# Altium PCB STM32F030.PcbDoc
Units mil, origin at the board's own origin, x right, y up, seen from the top; angles counter-clockwise.
Board outline 1960 x 1815 mil, 2 copper layers (Top Layer, Bottom Layer); 31 components, 48 nets, 165 pads, 26 vias.
Unrouted connection lines stored in the file: 2.
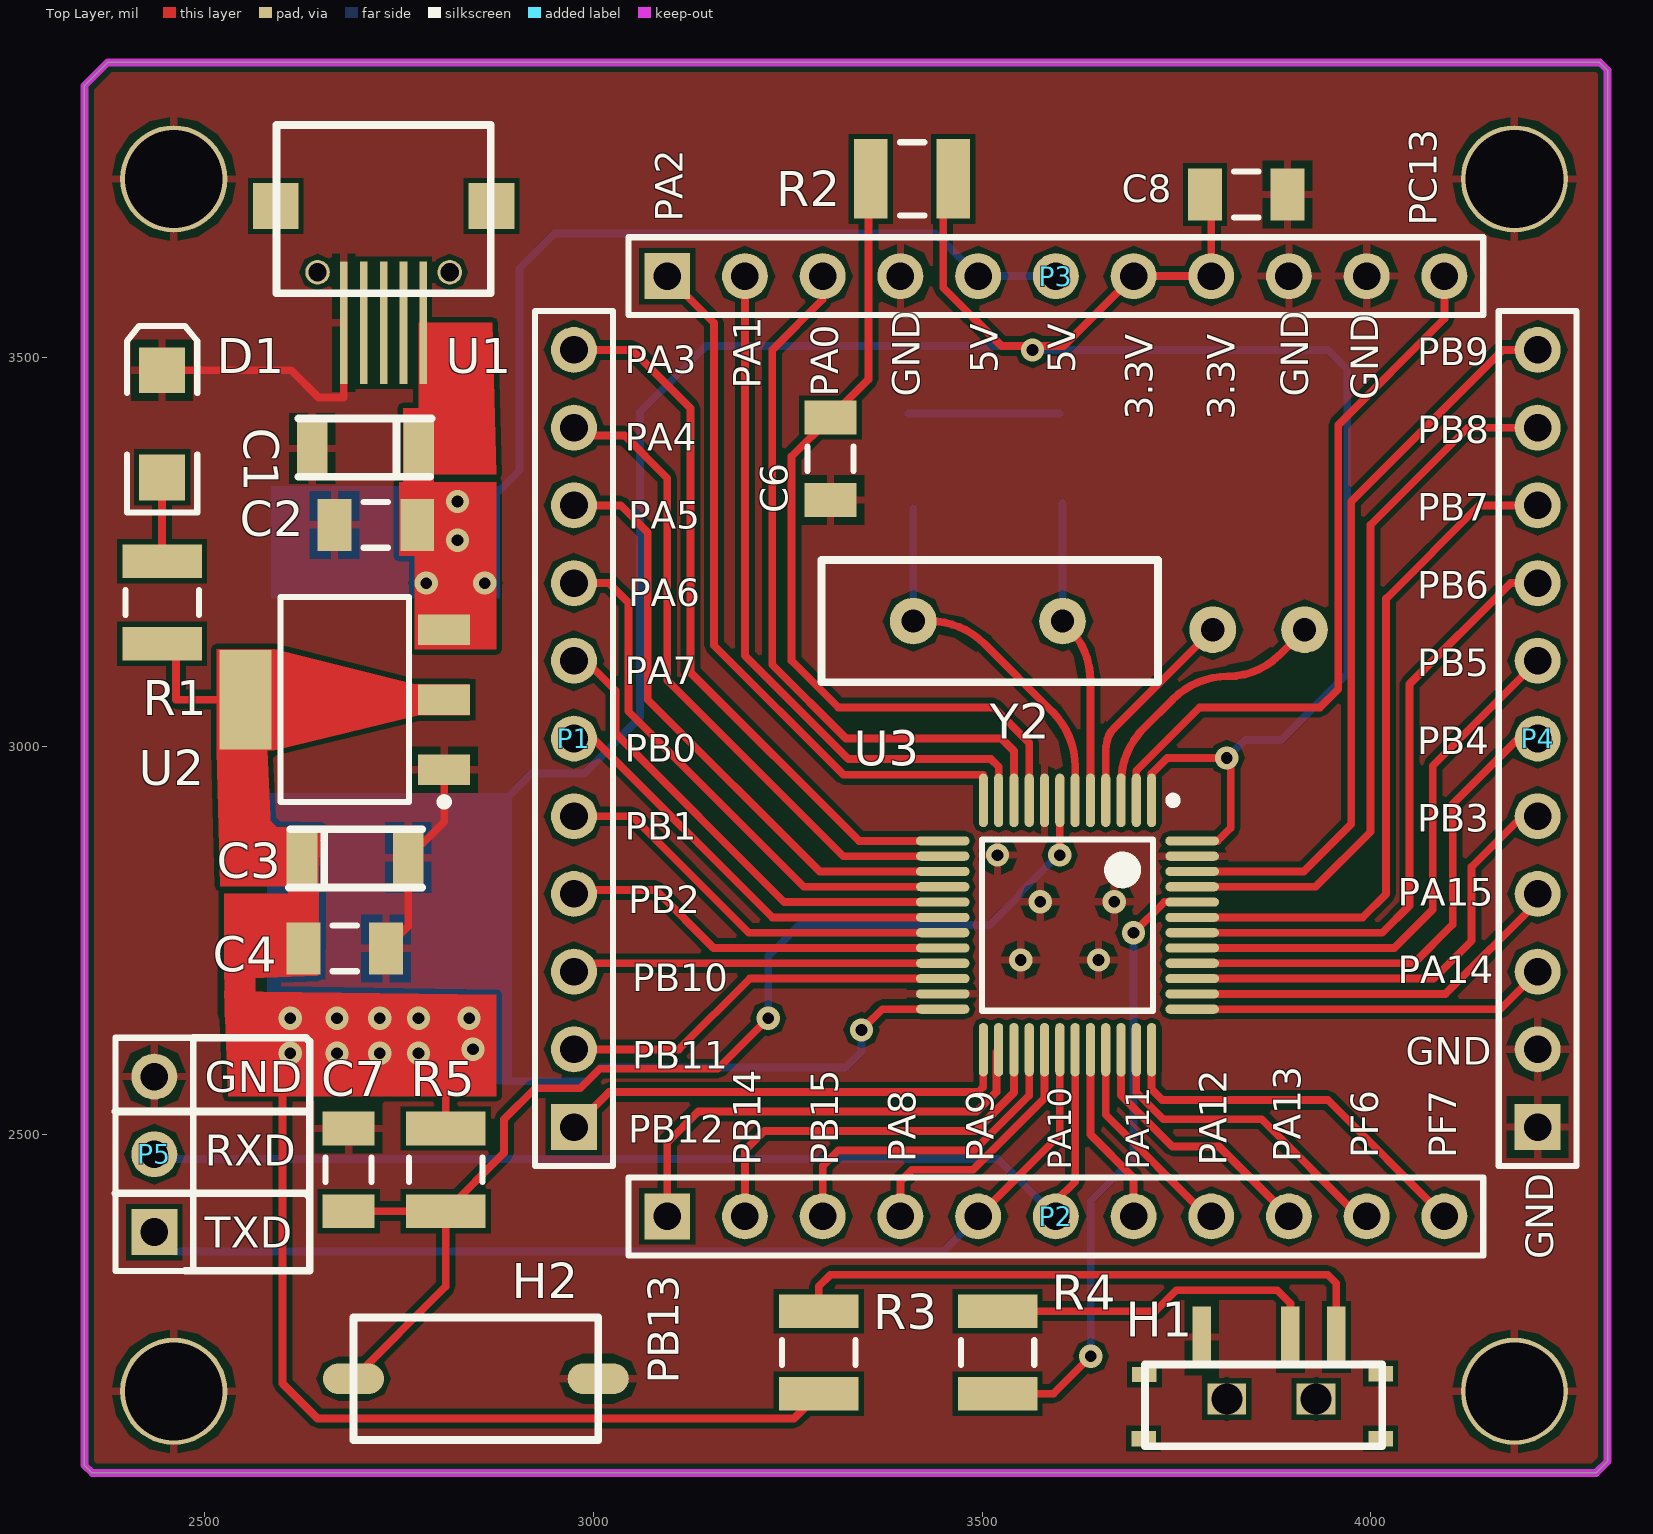
[diagram p0: Top Layer view]
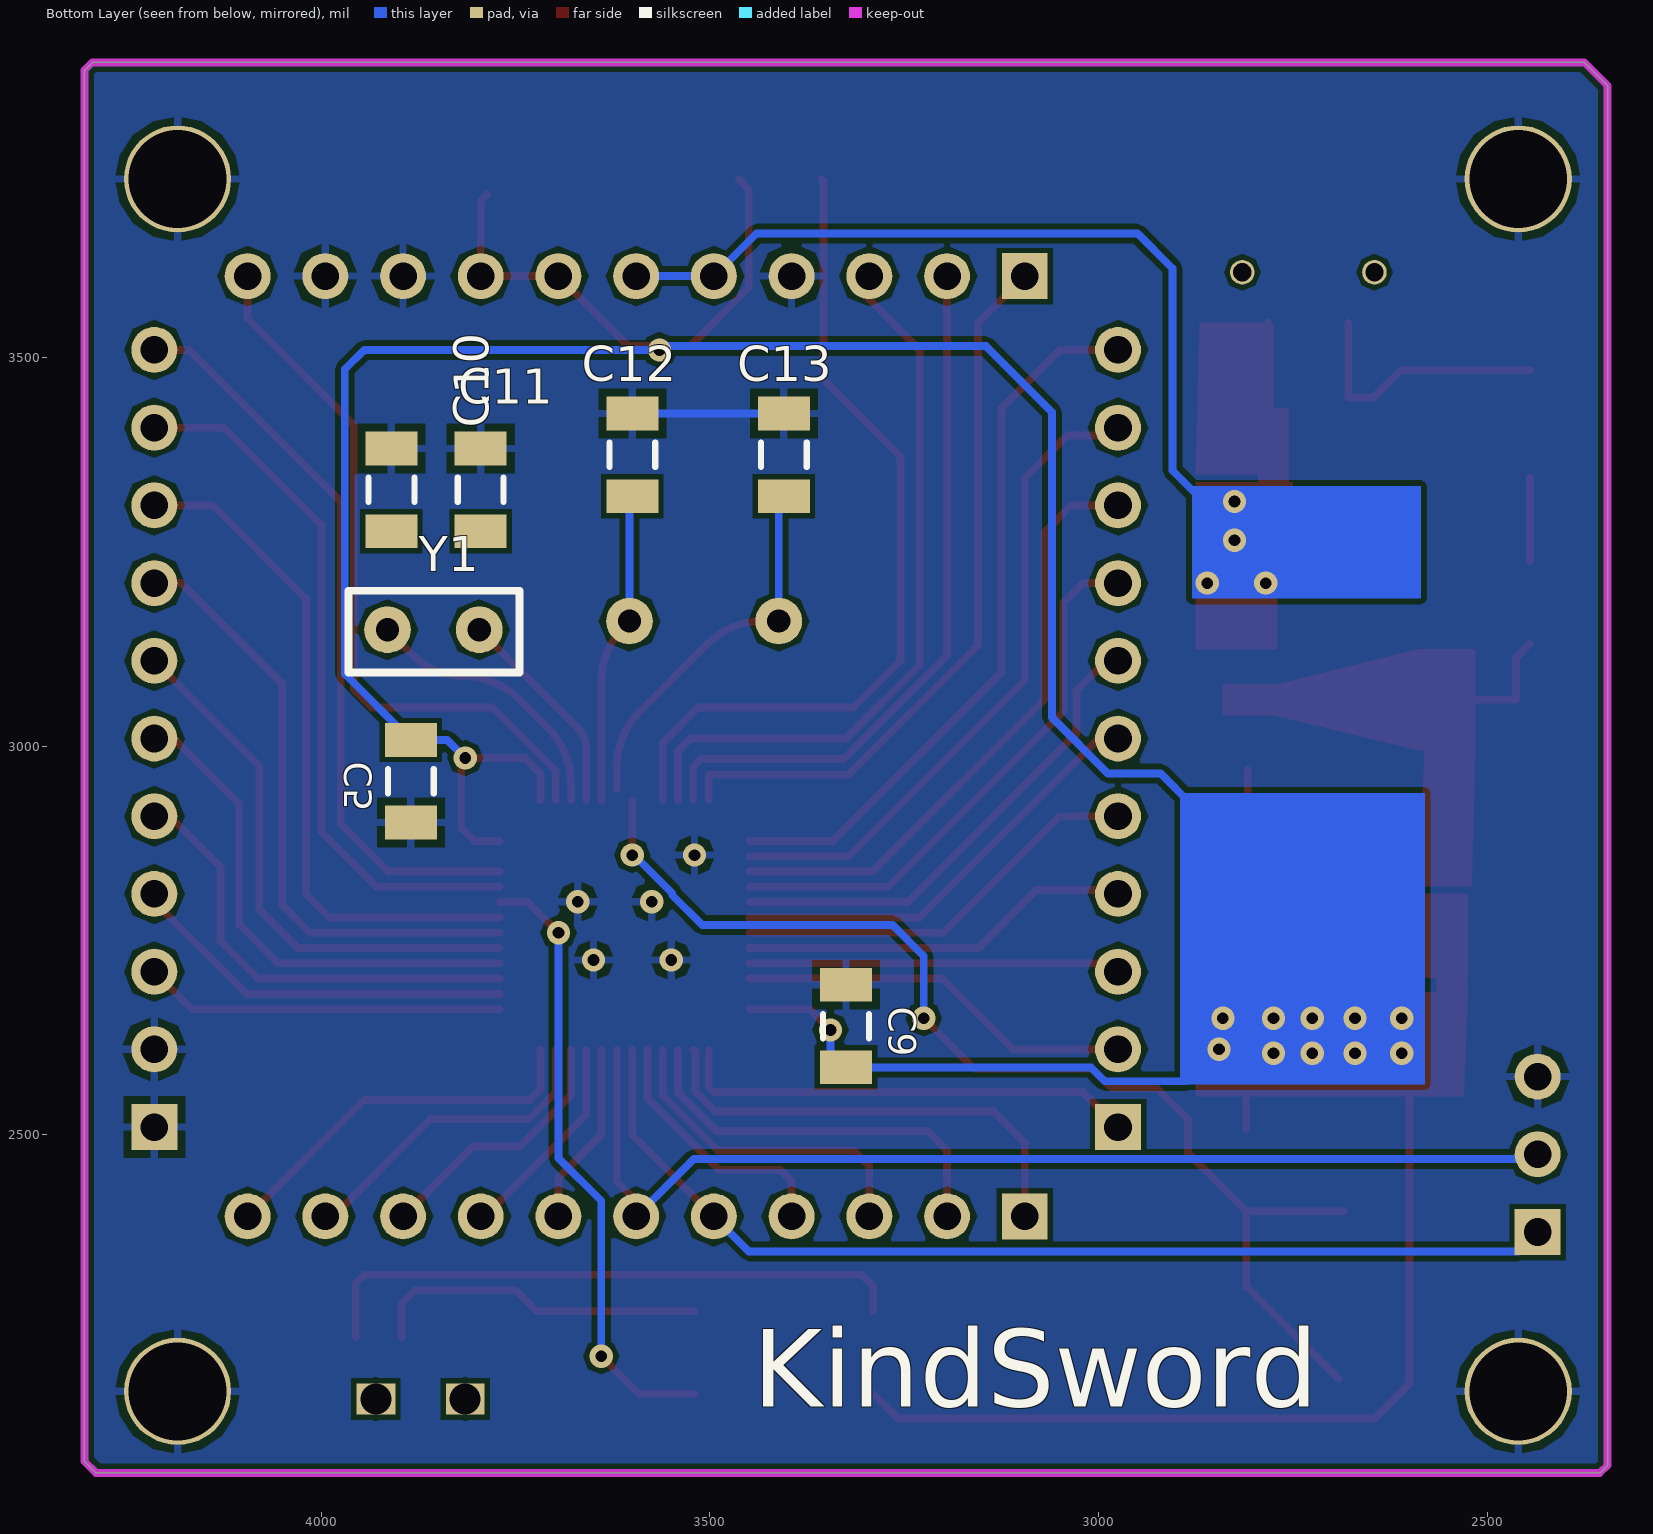
[diagram p1: Bottom Layer view, seen from below]

## Layer stack, top to bottom
Top Layer: signal copper 1.4
Dielectric: dielectric 12.6, FR-4, Dk 4.8
Bottom Layer: signal copper 1.4

## Board outline
2345,2075 2355,2065 4290,2065 4305,2080 4305,3870 4295,3880 2375,3880 2345,3850

## Design rules (kind name [scope] priority, off if disabled: settings)
Clearance U1 [All vs InComponent('U1')] p1: gap=6
Clearance MCU [InComponent('U3')] p2: gap=6
Clearance [All] p3: gap=6.5
PolygonConnect [All] p1: connectstyle=Relief reliefconductorwidth=10 reliefentries=4 polygonreliefangle="90 Angle" airgapwidth=10
RoutingVias [All] p1: holewidth=15 width=30 viastyle="Through Hole" minholewidth=10 minwidth=20 maxholewidth=50 maxwidth=100
SolderMaskExpansion [All] p1: expansion=4
Width [All] p1: maxlimit=100 minlimit=10 preferedwidth=10
28 further rules are at their usual default settings.

## Components (designator, comment, footprint, x,y, rotation, side; value= is the part's Value field where it differs from the comment)
C1 "A型坦电容" A型坦电容 2625,3420 r0 top
C2 "0.1UF" C1206 2720,3285 r0 top
C3 "A型坦电容" A型坦电容 2775,2820 r180 top
C4 "0.1UF" C1206 2680,2740 r180 top
C5 "0.1UF" C1206 3885,2955 r90 bottom
C6 "0.1UF" C1206 3305,3370 r90 top
C7 "0.1UF" C1206 2685,2455 r90 top
C8 "0.1UF" C1206 3840,3710 r180 top
C9 "0.1UF" C1206 3325,2640 r270 bottom
C10 "10PF" C1206 3910,3330 r270 bottom
C11 "10PF" C1206 3795,3330 r270 bottom
C12 "20PF" C1206 3600,3375 r270 bottom
C13 "20PF" C1206 3405,3375 r270 bottom
D1 "LED" 3.2X1.6X1.1 2445,3415 r90 top
H1 "七脚拨动开关" 七脚拨动开磁 4015,2100 r180 top
H2 "微动开关" 微动开关 2695,2265 r0 top
P1 "Header 11" HDR1X11 2975,2510 r90 top
P2 "Header 11" HDR1X11 3095,2395 r0 top
P3 "Header 11" HDR1X11 3095,3605 r0 top
P4 "Header 11" HDR1X11 4215,2510 r90 top
P5 "Header 3" HDR1X3 2435,2375 r90 top
R1 "1K" 14-1210 2445,3185 r90 top
R2 "0" 14-1210 3410,3730 r180 top
R3 "510" 14-1210 3520,2220 r270 top
R4 "10K" 14-1210 3290,2220 r270 top
R5 "10K" 14-1210 2810,2455 r270 top
U1 "USB母座" MicroUSB母座 2740,3705 r0 top
U2 "AMS1117" AMS1117 2680,3060 r180 top
U3 "STM32F030C8T6" STM32F030C8T6 3610,2770 r270 top
Y1 "31.768Khz" 31.768khz(3*8) 3915,3150 r180 bottom
Y2 "8Mhz" 晶振 3295,3245 r0 top

## Footprints (in the part's own frame and the unit in brackets; to place one, negate y for a bottom-side part, rotate by r counter-clockwise, add the part's x,y. Pads: shape width x height; smd on the part's side, far side on the other; paste and mask are expansions set on the pad)
3.2X1.6X1.1 [mm] "SMT LED; 2 Flat Leads"
  rect 1.5x1.5 smd: 1(-1.75,0) 2(1.75,0)
  silkscreen extent -2.9,-1.15 3.2,1.15
14-1210 [mm] "Chip Resistor, Body 3.2x2.5mm, IPC High Density"
  rect 1.1x2.6 smd: 1(-1.35,0) 2(1.35,0)
  silkscreen extent -0.4,-1.2 0.4,1.2, body extent -1.68,-1.32 1.68,1.32, height 0.9
31.768khz(3*8) [mil]
  round 60 hole 30: 0(0,0) 1(118.11,0)
  silkscreen extent -50,-55 170,50
AMS1117 [mm]
  rect 1.7x1 smd: 1(-3.25,2.29) 2(-3.25,0) 3(-3.25,-2.29)
  rect 1.7x3.25 smd: 2(3.25,0)
  silkscreen extent -3.38,-3.35 2.1,3.46, body extent -1.86,-3.35 1.86,3.35, height 1.8
A型坦电容 [mm]
  rect 1x1.8 smd: 0(0.335,-0.933) 1(3.81,-0.933)
  silkscreen extent -0.11,-1.86 4.23,0.04
C1206 [mm] "Chip Capacitor, Body 3.2x1.6mm, IPC High Density"
  rect 1.1x1.7 smd: 1(-1.35,0) 2(1.35,0)
  silkscreen extent -0.4,-0.75 0.4,0.75, body extent -1.7,-0.9 1.7,0.9, height 1.3
HDR1X3 [mm] "Connector; Header; 3 Position"
  rect 1.5x1.5 hole 0.9: 1(0,0)
  round 1.5 hole 0.9: 2(2.54,0) 3(5.08,0)
  silkscreen extent -1.27,-1.27 6.35,1.27
HDR1X11 [mm] "Connector; Header; 11 Position"
  rect 1.5x1.5 hole 0.9: 1(0,0)
  round 1.5 hole 0.9: 2(2.54,0) 3(5.08,0) 4(7.62,0) 5(10.16,0) 6(12.7,0) 7(15.24,0) 8(17.78,0) 9(20.32,0) 10(22.86,0) 11(25.4,0)
  silkscreen extent -1.27,-1.27 26.67,1.27
MicroUSB母座 [mm]
  rect 0.25x4 smd: 1(1.046,-4.064) 2(0.396,-4.064) 3(-0.254,-4.064) 4(-0.904,-4.064) 5(-1.554,-4.064)
  rect 1.5x1.5 smd: GND(-3.779,-0.25) GND(3.271,-0.25)
  round 0.8 hole 0.6: GND(-2.413,-2.413) GND(1.905,-2.413)
  silkscreen extent -3.75,-3.1 3.25,2.4
STM32F030C8T6 [mm]
  oval 1.75x0.3 smd: 1(-4.075,2.75) 2(-4.075,2.25) 3(-4.075,1.75) 4(-4.075,1.25) 5(-4.075,0.75) 6(-4.075,0.25) 7(-4.075,-0.25) 8(-4.075,-0.75) 9(-4.075,-1.25) 10(-4.075,-1.75) 11(-4.075,-2.25) 12(-4.075,-2.75) 25(4.075,-2.75) 26(4.075,-2.25) 27(4.075,-1.75) 28(4.075,-1.25) 29(4.075,-0.75) 30(4.075,-0.25) 31(4.075,0.25) 32(4.075,0.75) 33(4.075,1.25) 34(4.075,1.75) 35(4.075,2.25) 36(4.075,2.75)
  oval 0.3x1.75 smd: 13(-2.75,-4.075) 14(-2.25,-4.075) 15(-1.75,-4.075) 16(-1.25,-4.075) 17(-0.75,-4.075) 18(-0.25,-4.075) 19(0.25,-4.075) 20(0.75,-4.075) 21(1.25,-4.075) 22(1.75,-4.075) 23(2.25,-4.075) 24(2.75,-4.075) 37(2.75,4.075) 38(2.25,4.075) 39(1.75,4.075) 40(1.25,4.075) 41(0.75,4.075) 42(0.25,4.075) 43(-0.25,4.075) 44(-0.75,4.075) 45(-1.25,4.075) 46(-1.75,4.075) 47(-2.25,4.075) 48(-2.75,4.075)
  silkscreen extent -4.2,-2.8 2.8,3.58, body extent -3.5,-3.65 3.5,3.65, height 1.6
七脚拨动开磁 [mm]
  rect 0.6x2 smd: 1(1.501,-3.556) 2(3.001,-3.556) 3(5.901,-3.556)
  rect 0.8x0.5 smd: GND(0.051,-0.231) GND(0.051,-2.356) GND(7.776,-2.331) GND(7.801,-0.231)
  rect 1.27x1.016 hole 1.016: GND(2.159,-1.524) GND(5.08,-1.524)
  silkscreen extent 0,-2.66 7.75,0.02
微动开关 [mm]
  oval 2x1 smd: 1(-0.095,-2) 2(7.905,-2)
  silkscreen extent -0.1,-4 7.91,0
晶振 [mil]
  round 60 hole 30: 1(116.54,-83.9) 2(308.66,-83.9)
  silkscreen extent -2,-163 431,-5

## Part data
C1 C3: "C?"
C2 C4 C5 C6 C7 C8 C9 C10 C11 C12 C13: library part "Cap Semi", "Capacitor (Semiconductor SIM Model)"
D1: library part LED2, "Typical RED, GREEN, YELLOW, AMBER GaAs LED"
H1 H2: "H?"
P1 P2 P3 P4: "Header, 11-Pin"
P5: "Header, 3-Pin"
R1 R2 R3 R4 R5: library part Res3, "Resistor"
U1: library part MicroUSB母座, "U?"
U2 U3: "U?"
Y1: library part 31.768khz(3*8), "Y?"
Y2: library part 晶振, "Y?"

## Free pads (board coordinates)
  round 137.8 hole 125.98: 0(2460,2170) 0(2460,3730) 0(4185,2170) 0(4185,3730)

## Via types
v1: diameter 30, hole 15, Top Layer to Bottom Layer, 26 vias

## Nets (pads, with @x,y where several pads share a name; then routed paths per layer and width w, separated by ;. In a path a pad name is that pad's centre, name@x,y a point inside that pad or via, vN(x,y) a via of type N, cw(c..) or ccw(c..) an arc to the next point about the centre after c; other vN are vias at no path point)
3.3V: C3.1 C4.2 C5.2 C8.2 C9.2 P3.7 P3.8 R1.1 R2.1 R4.2 R5.1 U2.2 U3.1 U3.24 U3.48 | length 5527.3
  Top Layer w10: R1.1 2462.96,3113.89 2462.96,3060 2552.05,3060 2552.05,2929.68 C3.1 C3.1@2626.85,2854.88 ; 2600,2555 2600,2180 2645,2135 3258.15,2135 R4.2 ; R5.1 2810,2575 ; v1@3350,2640 3371.73,2661.73 U3.24 ; R2.1 3450,3716.85 3450,3590 3525,3515 3605,3515 P3.7 P3.8 3795,3701.85 C8.2 ; U3.1 3718.27,2964.93 3738.33,2985 3810,2985 3820,2975 3820,2895 3803.27,2878.27 U3.48
  Top Layer w40: 2545,2655 2545,2730 ; C4.2 C3.1@2626.85,2854.88
  Bottom Layer w10: 2860,2595 2886.03,2568.97 2991.99,2568.97 3009.87,2586.85 C9.2 3345,2606.85 v1(3345,2635) ; 2880,2925 2920,2965 2988.02,2965 3060,3036.98 3060,3430 3145,3515 3560,3515 v1(3565,3510) 3945,3510 3970,3485 3970,3093.15 C5.2 3838.15,3008.15 v1(3815,2985)
  other v1: 2610,2605 2670,2605 2725,2605 2775,2605 2845,2610 2610,2650 2670,2650 2725,2650 2775,2650 2840,2650
5V: C1.1 C2.2 P3.5 P3.6 U1.1 U2.3 | length 1453.5
  Top Layer w10: C2.2@2775,3286.85 C2.2 2807.95,3250.2 U2.3 ; C1.1 2781.18,3389.45 U1.1
  Top Layer w40: C2.2@2775,3286.85 C1.1
  Bottom Layer w10: 2870,3320 2905,3355 2905,3615 2950,3660 3440,3660 P3.5 P3.6
  other v1: 2785,3210 2860,3210 2825,3265 2825,3315
BOOT: R3.2 U3.44 | length 799.5
  Top Layer w10: R3.2 3591.85,2166.85 v1(3640,2215) ; v1(3695,2760) 3734.53,2799.53 U3.44
  Bottom Layer w10: v1(3640,2215) 3640,2415 3695,2470 v1(3695,2760)
GND: C1.0 C2.1 C3.0 C4.1 C5.1 C6.1 C7.2 C8.1 C9.1 C10.1 C11.1 C12.1 C13.1 D1.2 H1.3 H2.2 P3.4 P3.9 P3.10 P4.1 P4.2 P5.3 pad.0 U1.5 U2.1 U3.8 U3.23 U3.47 | length 800.4
  Top Layer w10: D1.2 2611.1,3483.9 2646.18,3448.82 2678.82,3448.82 U1.5 ; C4.1 2761.81,2768.66 C3.0 2807.95,2902.87 U2.1
  Bottom Layer w10: C13.1 C12.1
  other v1: 3550,2725 3650,2725 3575,2800 3670,2800 3520,2860
NetD1_1: D1.1 R1.2 | length 108
  Top Layer w10: R1.2 D1.1
NetH1_1: H1.1 R4.1 | length 777.6
  Top Layer w10: R4.1 3290,2305 3305,2320 3945,2320 3955.91,2309.09 H1.1
NetH1_2: H1.2 R3.1 | length 438.1
  Top Layer w10: R3.1 3723.15,2273.15 3750,2300 3880,2300 3896.85,2283.15 H1.2
NRST: C7.1 H2.1 R5.2 U3.7 | length 1513.6
  Top Layer w10: C7.1 R5.2 ; H2.1 2810,2305 R5.2 ; v1(3225,2650) 3160,2585 3008.02,2585 2983.02,2560 2925,2560 2885,2520 2885,2476.85 R5.2 ; v1(3600,2860) 3600,2930.28 U3.7
  Bottom Layer w10: v1(3225,2650) 3225,2730 3265,2770 3510,2770 3548.5,2808.5 3548.5,2810.98 3597.52,2860 v1(3600,2860)
OSC32_IN: C10.2 U3.3 Y1.0 | length 351.6
  Top Layer w10: U3.3 3678.9,2952.48 cw(c3778.9,2952.48) 3708.19,3023.19 3745.71,3060.71 cw(c3816.42,2990) 3816.42,3090 ccw(c3816.42,3183.14) 3882.28,3117.28 Y1.0
OSC32_OUT: C11.2 U3.4 Y1.1 | length 275.1
  Top Layer w10: U3.4 3659.21,2998.1 cw(c3661.9,2998.1) 3660,3000 cw(c3691.65,3000) 3669.27,3022.38 Y1.1
OSC_IN: C12.2 U3.5 Y2.2 | length 393.1
  Top Layer w10: Y2.2 3610.24,3154.53 cw(c3539.53,3083.81) 3639.53,3083.81 U3.5
  Bottom Layer w10: Y2.2 C12.2@3603.66,3313.01
OSC_OUT: C13.2 U3.6 Y2.1 | length 475.3
  Top Layer w10: Y2.1 3432.48,3161.1 cw(c3432.48,3061.1) 3503.19,3131.81 3590.55,3044.45 cw(c3519.84,2973.74) 3619.84,2973.74 U3.6@3619.84,2945
  Bottom Layer w10: Y2.1 C13.2@3411.54,3306.07
PA0: P3.3 U3.10 | length 947.5
  Top Layer w10: P3.3 3295,3575 3230,3510 3230,3105 3325,3010 3525,3010 3541.1,2993.9 U3.10
PA1: P3.2 U3.11 | length 917.2
  Top Layer w10: P3.2 3195,3116.67 3328.08,2983.58 3511.42,2983.58 3521.42,2973.58 U3.11
PA2: P3.1 U3.12 | length 948.5
  Top Layer w10: P3.1 3155,3545 3155,3130 3321.73,2963.27 3501.73,2963.27 U3.12
PA3: P1.11 U3.13 | length 935.4
  Top Layer w10: P1.11 3050,3510 3125,3435 3125,3095 3341.73,2878.27 U3.13
PA4: P1.10 U3.14 | length 855.3
  Top Layer w10: P1.10 2985,3400 3040,3400 3095,3345 3095,3085 3321.42,2858.58 U3.14
PA5: P1.9 U3.15 | length 795.6
  Top Layer w10: P1.9 3035,3310 3070,3275 3070,3060 3291.1,2838.9 U3.15
PA6: P1.8 U3.16 | length 718.4
  Top Layer w10: P1.8 3020,3210 3045,3185 3045,3045 3270.79,2819.21 U3.16
PA7: P1.7 U3.17 | length 635.4
  Top Layer w10: P1.7 2990,3110 3028.5,3071.5 3028.5,3016.5 3245.47,2799.53 U3.17
PA8: P2.4 U3.29 | length 337.3
  Top Layer w10: P2.4 3395,2440 3410,2455 3488.34,2455 3580.47,2547.13 U3.29
PA9: P2.5 P5.1 U3.30 | length 1347.1
  Top Layer w10: P2.5 3600.16,2500.16 U3.30
  Bottom Layer w10: P5.1 2460,2350 3450,2350 P2.5
PA10: P2.6 P5.2 U3.31 | length 1418
  Top Layer w10: P2.6 3595,2415 3619.84,2439.84 U3.31
  Bottom Layer w10: P5.2 2441.03,2468.97 3521.03,2468.97 P2.6
PA11: P2.7 U3.32 | length 237.5
  Top Layer w10: U3.32 3639.53,2500.47 3695,2445 P2.7
PA12: P2.8 U3.33 | length 273.7
  Top Layer w10: U3.33 3659.21,2525.79 3790,2395 P2.8
PA13: P2.9 U3.34 | length 339.2
  Top Layer w10: U3.34 3678.9,2551.1 3745,2485 3805,2485 P2.9
PA14: P4.3 U3.37 | length 464.6
  Top Layer w10: U3.37 4166.73,2661.73 P4.3
PA15: P4.4 U3.38 | length 503.7
  Top Layer w10: U3.38 4096.42,2681.42 4215,2800 P4.4
PB0: P1.6 U3.18 | length 569.9
  Top Layer w10: P1.6 3000,3010 3230.16,2779.84 U3.18
PB1: P1.5 U3.19 | length 536.6
  Top Layer w10: P1.5 3050,2910 3199.84,2760.16 U3.19
PB2: P1.4 U3.20 | length 507.5
  Top Layer w10: P1.4 2980,2815 3080,2815 3098.63,2796.37 3135.9,2759.1 3154.53,2740.47 U3.20
PB3: P4.5 U3.39 | length 586.7
  Top Layer w10: U3.39 4081.1,2701.1 4130,2750 4130,2845 4195,2910 P4.5
PB4: P4.6 U3.40 | length 655.2
  Top Layer w10: U3.40 4055.79,2720.79 4105.79,2770.79 4105.79,2925.79 4190,3010 P4.6
PB5: P4.7 U3.41 | length 706
  Top Layer w10: U3.41 4030.47,2740.47 4080,2790 4080,2975 P4.7
PB6: P4.8 U3.42 | length 797.8
  Top Layer w10: U3.42 4015.16,2760.16 4050.16,2795.16 4050.16,3080.16 4180,3210 P4.8
PB7: P4.9 U3.43 | length 886.8
  Top Layer w10: U3.43 3989.84,2779.84 4020,2810 4020,3190 4140,3310 P4.9
PB8: P4.10 U3.45 | length 920.7
  Top Layer w10: U3.45 3929.21,2819.21 4000,2890 4000,3285 4125,3410 P4.10
PB9: P4.11 U3.46 | length 965.6
  Top Layer w10: U3.46 3913.9,2838.9 3975,2900 3975,3315 4170,3510 P4.11
PB10: P1.3 U3.21 | length 479
  Top Layer w10: P1.3 2985.79,2720.79 U3.21
PB11: P1.2 U3.22 | length 512.3
  Top Layer w10: P1.2 3110,2610 3201.1,2701.1 U3.22
PB12: P1.1 U3.25 | length 596
  Top Layer w10: P1.1 3020,2555 3495,2555 3501.73,2561.73 U3.25
PB13: P2.1 U3.26 | length 601.1
  Top Layer w10: P2.1 3095,2490 3135,2530 3493.33,2530 3518.64,2555.3 3518.64,2606.79 U3.26
PB14: P2.2 U3.27 | length 517.1
  Top Layer w10: P2.2 3195,2480 3220,2505 3491.67,2505 3541.1,2554.43 U3.27
PB15: P2.3 U3.28 | length 427.2
  Top Layer w10: P2.3 3295,2460 3315,2480 3490,2480 3560.79,2550.78 U3.28
PC13: P3.11 U3.2 | length 929.6
  Top Layer w10: U3.2 3698.58,2968.58 3780,3050 3935,3050 3958.5,3073.5 3958.5,3413.5 4095,3550 P3.11
PF6: P2.10 U3.35 | length 417.4
  Top Layer w10: U3.35 3698.58,2554.75 3733.33,2520 3860,2520 3985,2395 P2.10
PF7: P2.11 U3.36 | length 495.6
  Top Layer w10: U3.36 3718.27,2558.4 3731.67,2545 3945,2545 P2.11
VDD: C6.2 R2.2 U3.9 | length 1085.6
  Top Layer w10: R2.2 3353.97,3727.12 3353.97,3472.12 C6.2 3255,3373.15 3255,3110 3315,3050 3515,3050 3560.79,3004.21 U3.9
pads on no net: H1.GND U1.2 U1.3 U1.4 U1.GND

## Polygon pours and split planes (outlines as drawn)
GND on Top Layer "Bottom Layer-No Net" (solid, remove dead copper, pour order 2): 2305,3945 2315,3955 4380,3955 4380,1855 4350,1825 2230,1825
GND on Bottom Layer "Bottom Layer-No Net" (solid, remove dead copper, pour order 4): 2140,4010 4815,4010 4880,4075 4465,3660 4465,1775 1995,1775 1905,1865

## Keep-outs
Keep-Out Layer:
  the board outline again, w10

## Other copper
Top Layer:
  region net 5V: 2750,3340 2875,3340 2875,3125 2770,3125 2770,3245 2750,3245
  region net 5V: 2870,3545 2875,3350 2755,3350 2755,3435 2775,3435 2775,3545
  region net 3.3V: 2525,2685 2875,2680 2875,2550 2530,2550
  region net 3.3V: 2645,2705 2525,2700 2525,2810 2626.85,2810 2645,2805
  region net 3.3V: 2645,2820 2650,2895 2585,2896.73 2580,2995 2515,2995 2520,2820
  region net 3.3V: 2840,3080 2770,3080 2590,3125 2515,3125 2515,2995 2590,2995 2775,3040 2840,3040
Bottom Layer:
  region net 5V: 2880,3190 2880,3335 2585,3335 2585,3190
  rectangle net 3.3V: 2580,2565 2895,2940

## Silkscreen, mask and mechanical layers (free items; w line width, h text height)
Top Overlay:
  lines w10: 2385,2425 2630,2425 2635,2420 ; 2385,2530 2635,2530 ; 2475,2325 2625,2325 2635,2325 2635,2620 2630,2625 2485,2625
  text "PA2" at 3115,3675 h35 r90
  text "PC13" at 4085,3670 h35 r90
  text "PB9" at 4060,3490 h35
  text "PA3" at 3040,3480 h35
  text "5V" at 3520,3480 h35 r90
  text "5V" at 3620,3480 h35 r90
  text "PA1" at 3215,3460 h35 r90
  text "PA0" at 3315,3450 h35 r90
  text "GND" at 3420,3450 h35 r90
  text "GND" at 3920,3450 h35 r90
  text "GND" at 4010,3445 h35 r90
  text "3.3V" at 3720,3420 h35 r90
  text "3.3V" at 3825,3420 h35 r90
  text "PB8" at 4060,3390 h35
  text "PA4" at 3040,3380 h35
  text "PB7" at 4060,3290 h35
  text "PA5" at 3045,3280 h35
  text "PB6" at 4060,3190 h35
  text "PA6" at 3045,3180 h35
  text "PB5" at 4060,3090 h35
  text "PA7" at 3040,3080 h35
  text "PB4" at 4060,2990 h35
  text "PB0" at 3040,2980 h35
  text "PB3" at 4060,2890 h35
  text "PB1" at 3040,2880 h35
  text "PA15" at 4035,2795 h35
  text "PB2" at 3045,2785 h35
  text "PA14" at 4035,2695 h35
  text "PB10" at 3050,2685 h35
  text "GND" at 4045,2590 h35
  text "PB11" at 3050,2585 h35
  text "GND" at 2500,2555 h40
  text "PB12" at 3045,2490 h35
  text "PF6" at 4010,2470 h35 r90
  text "PF7" at 4110,2470 h35 r90
  text "PA8" at 3415,2465 h35 r90
  text "PA9" at 3515,2465 h35 r90
  text "PA13" at 3910,2465 h35 r90
  text "RXD" at 2500,2460 h40
  text "PB14" at 3215,2460 h35 r90
  text "PB15" at 3315,2460 h35 r90
  text "PA12" at 3815,2460 h35 r90
  text "PA10" at 3615,2455 h30 r90
  text "PA11" at 3715,2455 h30 r90
  text "TXD" at 2500,2355 h40
  text "GND" at 4235,2340 h35 r90
  text "PB13" at 3110,2180 h40 r90
Bottom Overlay:
  text "KindSword" at 3445,2150 h100